# Altium PCB MCU(ZC-ST4X-A005A).PcbDoc (part 2 of 2)
Units mil, origin at the board's own origin, x right, y up, seen from the top; angles counter-clockwise.
Board outline 4255.94 x 3824.98 mil, 2 copper layers (Top Layer, Bottom Layer); 69 components, 79 nets, 331 pads, 521 vias.
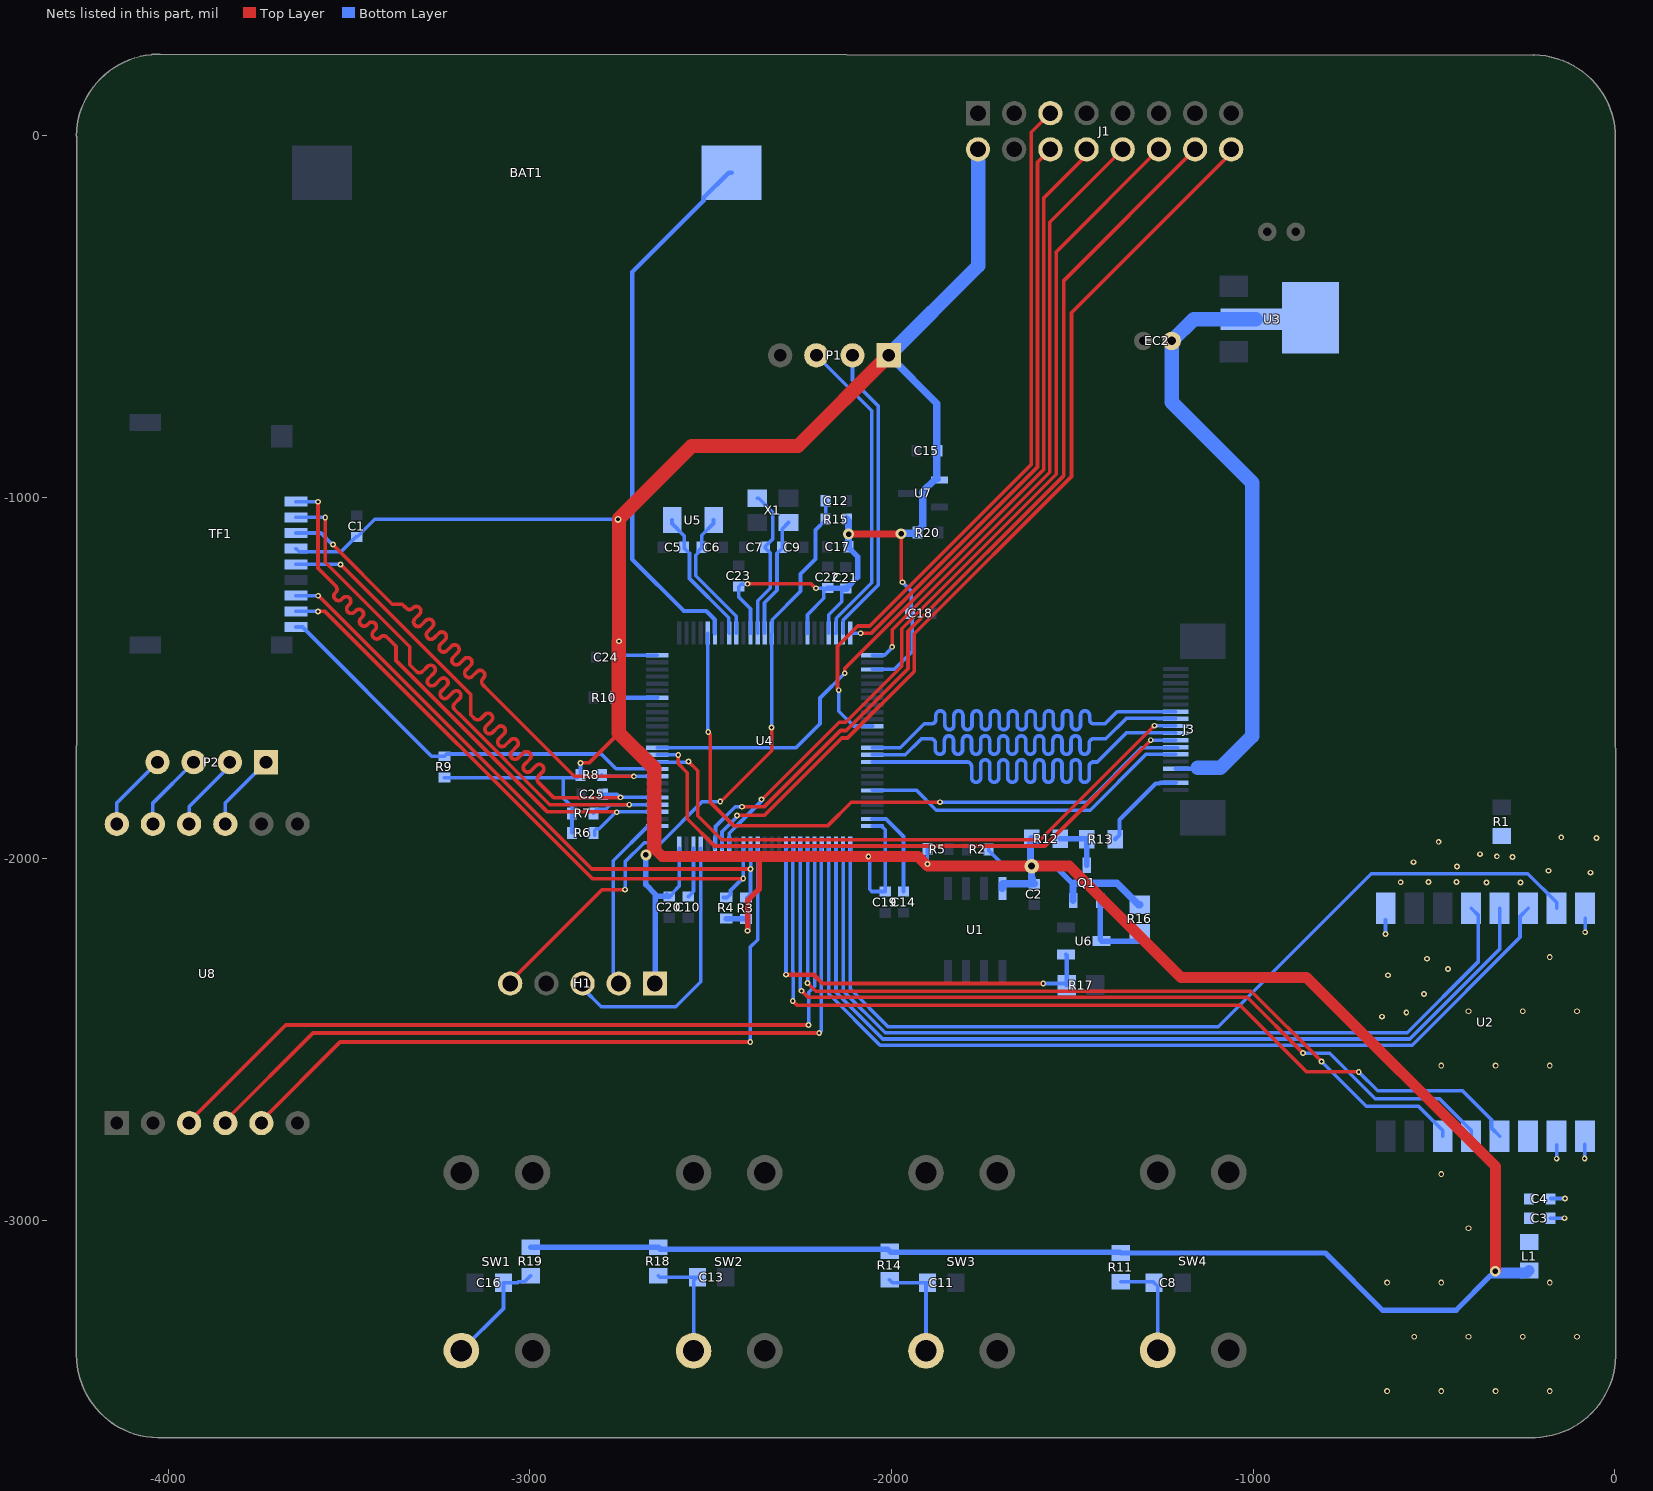
[diagram p2: the nets of this part, all layers, seen from the top]

## Via types
v1: diameter 16, hole 8, Top Layer to Bottom Layer, tented both sides, 270 vias
v2: diameter 16, hole 10, Top Layer to Bottom Layer, tented both sides, 245 vias
v3: diameter 30, hole 15, Top Layer to Bottom Layer, tented both sides, 4 vias
v4: diameter 40, hole 20, Top Layer to Bottom Layer, tented both sides, 1 vias
v5: diameter 20, hole 10, Top Layer to Bottom Layer, tented both sides, 1 vias

## Nets (pads, with @x,y where several pads share a name; then routed paths per layer and width w, separated by ;. In a path a pad name is that pad's centre, name@x,y a point inside that pad or via, vN(x,y) a via of type N, cw(c..) or ccw(c..) an arc to the next point about the centre after c; other vN are vias at no path point) (continued)
LCD_DB5: J3.7 U4.39 | length 1591.3
  Bottom Layer w10: U4.39@-2053.26,-1692.63 -1975.58,-1692.63 -1909.55,-1626.6 -1894.95,-1626.6 -1889.95,-1626.6 ccw(c-1889.95,-1614.1) -1877.45,-1614.1 -1877.45,-1603.18 cw(c-1864.95,-1603.18) -1852.45,-1603.18 -1852.45,-1630.2 ccw(c-1839.95,-1630.2) -1827.45,-1630.2 -1827.45,-1603.18 cw(c-1814.95,-1603.18) -1802.45,-1603.18 -1802.45,-1630.2 ccw(c-1789.95,-1630.2) -1777.45,-1630.2 -1777.45,-1603.18 cw(c-1764.95,-1603.18) -1752.45,-1603.18 -1752.45,-1630.2 ccw(c-1739.95,-1630.2) -1727.45,-1630.2 -1727.45,-1603.18 cw(c-1714.95,-1603.18) -1702.45,-1603.18 -1702.45,-1630.2 ccw(c-1689.95,-1630.2) -1677.45,-1630.2 -1677.45,-1603.18 cw(c-1664.95,-1603.18) -1652.45,-1603.18 -1652.45,-1630.2 ccw(c-1639.95,-1630.2) -1627.45,-1630.2 -1627.45,-1603.18 cw(c-1614.95,-1603.18) -1602.45,-1603.18 -1602.45,-1630.2 ccw(c-1589.95,-1630.2) -1577.45,-1630.2 -1577.45,-1603.18 cw(c-1564.95,-1603.18) -1552.45,-1603.18 -1552.45,-1630.2 ccw(c-1539.95,-1630.2) -1527.45,-1630.2 -1527.45,-1603.18 cw(c-1514.95,-1603.18) -1502.45,-1603.18 -1502.45,-1630.2 ccw(c-1489.95,-1630.2) -1477.45,-1630.2 -1477.45,-1603.18 cw(c-1464.95,-1603.18) -1452.45,-1603.18 -1452.45,-1614.1 ccw(c-1439.95,-1614.1) -1439.95,-1626.6 -1413.02,-1626.6 -1410,-1626.6 -1376.34,-1592.94 J3.7@-1214.35,-1592.94
LCD_DB6: J3.8 U4.40 | length 1587.7
  Bottom Layer w10: U4.40@-2053.26,-1712.31 -1961.65,-1712.31 -1921.27,-1671.93 -1917.36,-1668.02 -1891.26,-1668.02 cw(c-1891.26,-1680.52) -1878.76,-1680.52 -1878.76,-1698.12 ccw(c-1866.26,-1698.12) -1853.76,-1698.12 -1853.76,-1672.2 cw(c-1841.26,-1672.2) -1828.76,-1672.2 -1828.76,-1698.12 ccw(c-1816.26,-1698.12) -1803.76,-1698.12 -1803.76,-1672.2 cw(c-1791.26,-1672.2) -1778.76,-1672.2 -1778.76,-1698.12 ccw(c-1766.26,-1698.12) -1753.76,-1698.12 -1753.76,-1672.2 cw(c-1741.26,-1672.2) -1728.76,-1672.2 -1728.76,-1698.12 ccw(c-1716.26,-1698.12) -1703.76,-1698.12 -1703.76,-1672.2 cw(c-1691.26,-1672.2) -1678.76,-1672.2 -1678.76,-1698.12 ccw(c-1666.26,-1698.12) -1653.76,-1698.12 -1653.76,-1672.2 cw(c-1641.26,-1672.2) -1628.76,-1672.2 -1628.76,-1698.12 ccw(c-1616.26,-1698.12) -1603.76,-1698.12 -1603.76,-1672.2 cw(c-1591.26,-1672.2) -1578.76,-1672.2 -1578.76,-1698.12 ccw(c-1566.26,-1698.12) -1553.76,-1698.12 -1553.76,-1672.2 cw(c-1541.26,-1672.2) -1528.76,-1672.2 -1528.76,-1698.12 ccw(c-1516.26,-1698.12) -1503.76,-1698.12 -1503.76,-1672.2 cw(c-1491.26,-1672.2) -1478.76,-1672.2 -1478.76,-1698.12 ccw(c-1466.26,-1698.12) -1453.76,-1698.12 -1453.76,-1680.52 cw(c-1441.26,-1680.52) -1441.26,-1668.02 -1422.3,-1668.02 -1407.38,-1668.02 -1351,-1611.65 -1265,-1611.65 -1264.78,-1611.87 -1215.1,-1611.87 J3.8@-1214.35,-1612.62
LCD_DB7: J3.10 U4.41 | length 1581.5
  Bottom Layer w10: U4.41@-2053.26,-1732 -1821.1,-1732 -1791.1,-1732 cw(c-1791.1,-1744.5) -1778.6,-1744.5 -1778.6,-1775.64 ccw(c-1766.1,-1775.64) -1753.6,-1775.64 -1753.6,-1738.38 cw(c-1741.1,-1738.38) -1728.6,-1738.38 -1728.6,-1775.64 ccw(c-1716.1,-1775.64) -1703.6,-1775.64 -1703.6,-1738.38 cw(c-1691.1,-1738.38) -1678.6,-1738.38 -1678.6,-1775.64 ccw(c-1666.1,-1775.64) -1653.6,-1775.64 -1653.6,-1738.38 cw(c-1641.1,-1738.38) -1628.6,-1738.38 -1628.6,-1775.64 ccw(c-1616.1,-1775.64) -1603.6,-1775.64 -1603.6,-1738.38 cw(c-1591.1,-1738.38) -1578.6,-1738.38 -1578.6,-1775.64 ccw(c-1566.1,-1775.64) -1553.6,-1775.64 -1553.6,-1738.38 cw(c-1541.1,-1738.38) -1528.6,-1738.38 -1528.6,-1775.64 ccw(c-1516.1,-1775.64) -1503.6,-1775.64 -1503.6,-1738.38 cw(c-1491.1,-1738.38) -1478.6,-1738.38 -1478.6,-1775.64 ccw(c-1466.1,-1775.64) -1453.6,-1775.64 -1453.6,-1744.5 cw(c-1441.1,-1744.5) -1441.1,-1732 -1431,-1732 -1391.25,-1692.25 -1350.65,-1651.65 -1214.69,-1651.65 J3.10@-1214.35,-1651.99
LCD_RD: J3.9 U4.85 | length 1727.9
  Top Layer w10: v1(-2561.1,-1731.1) -2535.75,-1756.45 -2535.75,-1881 -2469.45,-1947.3 -1588.72,-1947.3 -1273.29,-1631.87 v1(-1273.29,-1631.65)
  Bottom Layer w10: U4.85@-2647.74,-1731.99 -2647.11,-1732.62 -2562.62,-1732.62 v1(-2561.1,-1731.1) ; v1(-1273.29,-1631.65) -1272.79,-1632.15 -1214.51,-1632.15 J3.9@-1214.35,-1632.31
LCD_RESET: J3.13 U4.45 | length 925.4
  Bottom Layer w10: U4.45@-2053.26,-1810.74 -1930.66,-1810.74 -1876.1,-1865.3 -1450.6,-1865.3 -1296.35,-1711.05 J3.13@-1214.35,-1711.05
LCD_RS: J3.12 U4.5 | length 1878.8
  Top Layer w10: v1(-2506.65,-1648.95) -2506.65,-1650.58 -2500.68,-1656.54 -2500.68,-1844.07 -2436.85,-1907.9 -2175.7,-1907.9 -2110.95,-1843.15 v1(-1865.8,-1843.15)
  Bottom Layer w10: U4.5@-2507.98,-1375.7 -2507.98,-1646 -2506.65,-1647.33 v1(-2506.65,-1648.95) ; v1(-1865.8,-1843.15) -1458.85,-1843.15 -1308.84,-1693.14 J3.12@-1208.7,-1693.14
LCD_WR: J3.11 U4.86 | length 1748.3
  Top Layer w10: v1@-2589.4,-1713.01 v1(-2589.79,-1712.62) -2589.79,-1736.31 -2564.6,-1761.5 -2564.6,-1889.15 -2489.45,-1964.3 -1575.94,-1964.3 v1(-1283.32,-1671.68)
  Bottom Layer w10: U4.86@-2647.74,-1712.31 -2647.64,-1712.21 -2591.07,-1712.21 -2590.65,-1712.62 v1(-2589.79,-1712.62) ; v1(-1283.32,-1671.68) J3.11@-1214.35,-1671.68
LED_A: J3.17 R13.1 | length 256.1
  Bottom Layer w12: R13.1@-1381.4,-1945.3 -1369.65,-1933.55 -1369.65,-1891.55 -1269.75,-1791.65 -1259.3,-1791.65 -1257.44,-1789.79 J3.17@-1214.35,-1789.79
LORA_DI00: U2.5 U4.58 | length 2423.4
  Top Layer w10: v1(-2248.75,-2364.75) -2230.65,-2382.85 -1016.5,-2382.85 v1(-862.5,-2536.85)
  Bottom Layer w10: U4.58@-2252.08,-1970.18 -2252.55,-1970.65 -2252.55,-2359.33 -2248.75,-2363.13 v1(-2248.75,-2364.75) ; v1(-862.5,-2536.85) -862.3,-2537.05 -788.58,-2537.05 -662.43,-2663.2 -484.78,-2663.2 -397.32,-2750.67 U2.5@-397.32,-2766.41
LORA_DI01: U2.6 U4.57 | length 2314.5
  Top Layer w10: v1(-2231.95,-2343.5) -2209.6,-2365.85 -1005.22,-2365.85 -810.85,-2560.21 v1(-810.85,-2560.45)
  Bottom Layer w10: U4.57@-2232.39,-1970.18 -2231.6,-1970.97 -2232.3,-1971.67 -2231.95,-1972.02 v1(-2231.95,-2343.5) ; v1(-810.85,-2560.45) -687.4,-2683.9 -542.82,-2683.9 -476.06,-2750.67 U2.6@-476.06,-2766.41
LORA_RESET: U2.4 U4.59 | length 2546.8
  Top Layer w10: v1(-2273.01,-2392.96) -2261.26,-2404.7 -1036.5,-2404.7 -852.2,-2589 v1(-708.35,-2589)
  Bottom Layer w10: v1(-2273.01,-2392.96) -2271.6,-2391.55 -2271.6,-2311.87 -2273.01,-2310.46 -2273.01,-1971.42 U4.59@-2271.76,-1970.18 ; v1(-708.35,-2589) -656.05,-2641.3 -421.15,-2641.3 -341.14,-2721.32 -341.14,-2743.85 U2.4@-318.58,-2766.41
ML307R-EN: U4.64 U8.5 | length 1992.8
  Top Layer w10: U8.5@-3742.05,-2730.35 -3742.05,-2723.8 -3524.6,-2506.35 v1(-2390.5,-2506.35)
  Bottom Layer w10: v1(-2390.5,-2506.35) -2390.5,-2243.45 -2370.19,-2223.14 U4.64@-2370.19,-1970.18
NetBAT1_1: BAT1.1 U4.6 | length 1521.9
  Bottom Layer w12: U4.6@-2488.3,-1375.7 -2488.39,-1375.61 -2488.39,-1338.86 -2512.45,-1314.8 -2574.05,-1314.8 -2716.85,-1172 -2716.85,-377.54 -2518.89,-179.58 -2518.89,-171.7 -2450.08,-102.9 BAT1.1@-2442.21,-102.9
NetC3_2: C3.2 C4.2 L1.2 U2.3
NetC5_2: C5.2 U4.8 U5.1 | length 378.2
  Bottom Layer w10: U5.1@-2606.9,-1063.11 -2606.9,-1072.96 -2573.5,-1106.36 -2573.5,-1140.72 -2564.72,-1149.5 -2564.46,-1149.5 -2558.6,-1155.36 -2558.6,-1224.85 -2449.83,-1333.62 -2449.83,-1374.79 U4.8@-2448.93,-1375.7
NetC6_2: C6.2 U4.9 U5.2 | length 379.9
  Bottom Layer w10: U5.2@-2492.1,-1063.11 -2492.1,-1072.96 -2524.48,-1105.34 -2524.48,-1139.92 -2525.38,-1139.92 -2534.21,-1148.75 -2534.21,-1153.08 -2541.25,-1160.13 -2541.25,-1217.4 -2429.24,-1329.41 U4.9@-2429.24,-1375.7
NetC7_2: C7.2 U4.12 X1.3 | length 421.6
  Bottom Layer w10: X1.3@-2371.31,-1002.93 -2367.37,-1002.93 -2328.5,-1041.81 -2328.5,-1115.73 -2349.2,-1136.43 C7.2@-2349.2,-1138.4 -2349.2,-1140.37 -2335.3,-1154.27 -2335.3,-1251.6 -2370.19,-1286.49 U4.12@-2370.19,-1375.7
NetC8_2: C8.2 R11.1 SW4.1 | length 284.4
  Bottom Layer w10: R11.1@-1366.25,-3168.65 -1277.41,-3168.65 C8.2@-1274.36,-3171.7 -1264.3,-3181.76 SW4.1@-1264.3,-3358.74
NetC9_1: C9.1 U4.13 X1.1 | length 333.7
  Bottom Layer w10: U4.13@-2350.5,-1375.7 -2351.25,-1374.95 -2351.25,-1291.59 -2316.55,-1256.89 -2316.55,-1154.79 -2302.53,-1140.77 -2302.53,-1087.7 X1.1@-2284.69,-1069.86
NetC10_2: C10.2 U4.73 | length 141.3
  Bottom Layer w10: C10.2@-2562.35,-2104.12 -2560.38,-2104.12 -2551.6,-2095.34 -2551.6,-2093.37 -2547.35,-2089.12 U4.73@-2547.35,-1970.18
NetC11_2: C11.2 R14.1 SW3.1 | length 297.7
  Bottom Layer w10: R14.1@-2005.5,-3163.3 -1997.1,-3171.7 C11.2@-1901.04,-3171.7 -1904.6,-3175.26 SW3.1@-1904.6,-3359.99
NetC13_2: C13.2 R18.1 SW2.1 | length 317.7
  Bottom Layer w10: R18.1@-2644.72,-3152.26 -2640.77,-3156.2 C13.2@-2536.96,-3156.2 -2547.3,-3166.55 SW2.1@-2547.3,-3360.19
NetC14_2: C14.2 U4.49 | length 258.3
  Bottom Layer w12: U4.49@-2053.26,-1889.48 -2015.47,-1889.48 -1966.8,-1938.15 C14.2@-1966.8,-2089.82
NetC16_2: C16.2 R19.1 SW1.1 | length 318.8
  Bottom Layer w10: SW1.1@-3189.25,-3359.39 -3072.84,-3242.99 C16.2@-3072.84,-3171.71 -3034.22,-3171.71 -3031.42,-3168.91 -3014.62,-3168.91 R19.1@-2997.97,-3152.26
NetP2_1: P2.1 U8.10 | length 219.1
  Top Layer w10: P2.1@-3729.5,-1732.7 P2.1@-3728.4,-1733.8
  Bottom Layer w10: U8.10@-3842.05,-1903.58 -3842.05,-1845.25 P2.1@-3729.5,-1732.7
NetP2_2: P2.2 U8.9 | length 218.3
  Top Layer w10: P2.2@-3829.5,-1732.7 P2.2@-3828.95,-1733.25
  Bottom Layer w10: U8.9@-3942.05,-1903.58 -3942.05,-1855.6 -3829.5,-1743.05 P2.2@-3829.5,-1732.7
NetP2_3: P2.3 U8.8 | length 218.3
  Top Layer w10: P2.3@-3929.5,-1732.7 P2.3@-3928.95,-1733.25
  Bottom Layer w10: U8.8@-4042.05,-1903.58 -4042.05,-1845.25 P2.3@-3929.5,-1732.7
NetP2_4: P2.4 U8.7 | length 218.3
  Top Layer w10: P2.4@-4029.5,-1732.7 P2.4@-4028.95,-1733.25
  Bottom Layer w10: U8.7@-4142.05,-1903.58 -4142.05,-1845.25 P2.4@-4029.5,-1732.7
NetQ1_1: Q1.1 R16.1 U6.3 | length 217.3
  Bottom Layer w15: U6.3@-1423.6,-2221.7 -1423.38,-2221.48 -1423.38,-2115.25 Q1.1@-1423.15,-2115.02 ; U6.3@-1419.2,-2227.1 -1310,-2227.1 R16.1@-1309.1,-2228
NetQ1_3: Q1.3 R12.2 R13.2 | length 145.8
  Bottom Layer w15: R12.2@-1533.35,-1944.45 -1461.25,-1944.45 R13.2@-1460.4,-1945.3 -1460.48,-1945.38 -1460.48,-2017.7 Q1.3@-1460.55,-2017.77
NetR10_2: R10.2 U4.94 | length 117.1
  Bottom Layer w12: R10.2@-2764.62,-1554.3 -2764.19,-1554.73 -2647.83,-1554.73 U4.94@-2647.74,-1554.83
NRST: C12.2 H1.5 R15.1 U4.14 | length 1788.6
  Top Layer w10: H1.5@-3057.29,-2341.74 -2800.65,-2085.1 v1(-2736.6,-2085.1) ; v1@-2472.3,-1841.95 -2331.55,-1701.2 v1(-2331.55,-1637.05)
  Bottom Layer w10: v1(-2736.6,-2085.1) -2736.6,-2008.12 -2683.92,-1955.43 -2636.78,-1955.43 -2522.9,-1841.55 v1(-2473.45,-1841.55) ; v1@-2330.82,-1637.05 U4.14@-2330.82,-1375.7 -2329.91,-1374.79 -2329.91,-1338.41 -2251.65,-1260.15 -2251.65,-1212.35 -2210.3,-1171 -2210.3,-1090.59 -2182.1,-1062.39 C12.2@-2182.1,-1009.4
PWM01: J1.5 U4.36 | length 2037.4
  Top Layer w10: v1(-2145.9,-1533.55) -2149.3,-1530.15 -2149.3,-1411.83 -2093.59,-1356.12 -2059.99,-1356.12 -1613.35,-909.48 -1613.35,9.2 J1.5@-1560.8,61.75
  Bottom Layer w10: v1(-2145.9,-1533.55) -2145.9,-1591.6 -2104.84,-1632.66 -2052.35,-1632.66 U4.36@-2053.26,-1633.57 ; J1.5@-1560.8,54.35 J1.5@-1560.8,61.75
RFGND: C3.1 C4.1 R1.2 U2.1 U2.2 U2.9 U2.16 | length 233.2
  Bottom Layer w10: v1(-634.2,-2207.55) U2.9@-634.2,-2168.68 ; C3.1@-178.37,-2993.3 v1(-139.5,-2993.3) ; C4.1@-176.92,-2938.8 v1(-138.05,-2938.8) ; v1(-161.1,-2828.85) U2.2@-161.1,-2789.98 ; v1(-83.55,-2828.35) U2.1@-83.55,-2789.48 ; v1(-82.2,-2202.7) U2.16@-82.2,-2163.83
  other v1: -644.2,-2436.15 -576.65,-2424.7 -527.8,-2373.8 -627.55,-2321.8 -461.25,-2304.15 -519.45,-2276.1 -354.85,-2065.55 -261.4,-2065.55 -592.35,-2064.6 -437.95,-2064.15 -515.4,-2063.65 -67.4,-2038.1 -183.8,-2032.9 -436.35,-2021 -556.9,-2009 -283.05,-1995.05 -326.45,-1992.85 -372.85,-1986.95 -487.25,-1952.85 -50.75,-1942.5 -148.45,-1940.4
  other v2: -629.9,-3471.44 -479.9,-3471.44 -329.9,-3471.44 -179.9,-3471.44 -554.9,-3321.44 -404.9,-3321.44 -254.9,-3321.44 -104.9,-3321.44 -629.9,-3171.44 -479.9,-3171.44 -179.9,-3171.44 -404.9,-3021.44 -479.9,-2871.44 -479.9,-2571.44 -329.9,-2571.44 -179.9,-2571.44 -404.9,-2421.44 -254.9,-2421.44 -104.9,-2421.44 -179.9,-2271.44
SBWTCK: H1.2 U4.76 | length 515.7
  Bottom Layer w10: H1.2@-2740.95,-2347.85 -2769.15,-2319.65 -2769.15,-2004.98 -2673.33,-1909.16 U4.76@-2647.74,-1909.16
SBWTDIO: H1.3 U4.72 | length 744.3
  Bottom Layer w10: H1.3@-2852.92,-2358.18 -2802.4,-2408.7 -2596.65,-2408.7 -2527.67,-2339.72 U4.72@-2527.67,-1970.18
SDIO_CK: C25.1 TF1.5 U4.80 | length 1684.3
  Top Layer w10: v1(-3523.5,-1185.7) -3163.65,-1545.55 -3163.65,-1601.15 -3156.4,-1608.4 -3152.86,-1611.94 ccw(c-3144.03,-1603.1) -3135.19,-1611.94 -3124.17,-1600.92 cw(c-3115.33,-1609.76) -3106.49,-1600.92 cw(c-3115.33,-1609.76) -3106.49,-1618.6 -3120.61,-1632.72 ccw(c-3111.77,-1641.56) -3120.61,-1650.4 ccw(c-3111.77,-1641.56) -3102.94,-1650.4 -3088.82,-1636.28 cw(c-3079.98,-1645.12) -3071.14,-1636.28 cw(c-3079.98,-1645.12) -3071.14,-1653.95 -3085.26,-1668.07 ccw(c-3076.42,-1676.91) -3085.26,-1685.75 ccw(c-3076.42,-1676.91) -3067.58,-1685.75 -3053.46,-1671.63 cw(c-3044.62,-1680.47) -3035.78,-1671.63 cw(c-3044.62,-1680.47) -3035.78,-1689.31 -3049.9,-1703.43 ccw(c-3041.06,-1712.27) -3049.9,-1721.11 ccw(c-3041.06,-1712.27) -3032.22,-1721.11 -3018.11,-1706.99 cw(c-3009.27,-1715.83) -3000.43,-1706.99 cw(c-3009.27,-1715.83) -3000.43,-1724.67 -3014.55,-1738.78 ccw(c-3005.71,-1747.62) -3014.55,-1756.46 ccw(c-3005.71,-1747.62) -2996.87,-1756.46 -2982.75,-1742.34 cw(c-2973.91,-1751.18) -2965.07,-1742.34 cw(c-2973.91,-1751.18) -2965.07,-1760.02 -2976.09,-1771.03 ccw(c-2967.25,-1779.87) -2976.09,-1788.71 -2934.38,-1830.42 -2925.26,-1830.42 -2749.97,-1830.42 v1(-2749.3,-1829.75)
  Bottom Layer w10: TF1.5@-3646.33,-1185.7 v1(-3523.5,-1185.7) ; C25.1@-2797.92,-1821.75 -2758.16,-1821.75 -2750.16,-1829.75 -2648.41,-1829.75 U4.80@-2647.74,-1830.42
SDIO_CMD: R8.1 TF1.3 U4.83 | length 1722.9
  Top Layer w10: v1(-3544.45,-1131.1) -3544.45,-1131.6 -3380.45,-1295.6 -3352.95,-1295.6 -3345.22,-1303.33 -3341.69,-1306.86 ccw(c-3332.85,-1298.02) -3324.01,-1306.86 -3322.8,-1305.65 cw(c-3313.97,-1314.49) -3305.13,-1305.65 cw(c-3313.97,-1314.49) -3305.13,-1323.33 -3317.91,-1336.11 ccw(c-3309.07,-1344.95) -3317.91,-1353.79 ccw(c-3309.07,-1344.95) -3300.23,-1353.79 -3287.45,-1341.01 cw(c-3278.61,-1349.85) -3269.77,-1341.01 cw(c-3278.61,-1349.85) -3269.77,-1358.69 -3282.55,-1371.47 ccw(c-3273.71,-1380.31) -3282.55,-1389.14 ccw(c-3273.71,-1380.31) -3264.87,-1389.14 ; -3264.87,-1389.14 -3252.09,-1376.36 cw(c-3243.25,-1385.2) -3234.42,-1376.36 cw(c-3243.25,-1385.2) -3234.42,-1394.04 -3247.2,-1406.82 ccw(c-3238.36,-1415.66) -3247.2,-1424.5 ccw(c-3238.36,-1415.66) -3229.52,-1424.5 -3216.74,-1411.72 cw(c-3207.9,-1420.56) -3199.06,-1411.72 cw(c-3207.9,-1420.56) -3199.06,-1429.4 -3211.84,-1442.18 ccw(c-3203,-1451.02) -3211.84,-1459.86 ccw(c-3203,-1451.02) -3194.16,-1459.86 -3181.38,-1447.08 cw(c-3172.54,-1455.91) -3163.71,-1447.08 cw(c-3172.54,-1455.91) -3163.71,-1464.75 -3176.49,-1477.53 ccw(c-3167.65,-1486.37) -3176.49,-1495.21 ccw(c-3167.65,-1486.37) -3158.81,-1495.21 -3146.03,-1482.43 cw(c-3137.19,-1491.27) -3128.35,-1482.43 cw(c-3137.19,-1491.27) -3128.35,-1500.11 -3129.56,-1501.32 ccw(c-3120.72,-1510.15) -3129.56,-1518.99 -3116.58,-1531.97 -2877.19,-1771.36 -2712.83,-1771.36 v1(-2712.51,-1771.68)
  Bottom Layer w10: TF1.3@-3646.33,-1099.09 -3577.61,-1099.09 -3545.6,-1131.1 v1(-3544.45,-1131.1) ; R8.1@-2800.87,-1768 -2797.19,-1771.68 v1(-2712.51,-1771.68) -2712.2,-1771.36 U4.83@-2647.74,-1771.36
SDIO_D0: R3.1 TF1.7 U4.65 | length 1716.4
  Top Layer w10: v1(-3585.2,-1272.35) -3584.21,-1272.35 -2828.73,-2027.83 v1(-2390.19,-2027.85)
  Bottom Layer w10: TF1.7@-3646.33,-1272.32 v1(-3585.2,-1272.35) ; R3.1@-2400.1,-2107.77 -2390.92,-2098.59 -2390.92,-2093 -2389.85,-2091.93 -2389.85,-2028.19 v1(-2390.19,-2027.85) -2389.15,-2026.79 U4.65@-2389.15,-1965.26
SDIO_D1: R4.1 TF1.8 U4.66 | length 1709.4
  Top Layer w10: v1(-3585.55,-1315.8) -3566.35,-1315.8 -2827.75,-2054.4 v1(-2409.9,-2054.4)
  Bottom Layer w10: TF1.8@-3646.33,-1315.62 -3585.73,-1315.62 v1(-3585.55,-1315.8) ; R4.1@-2464.94,-2106.87 -2454.79,-2106.87 -2445.32,-2097.39 -2445.32,-2087.24 -2413.62,-2055.55 -2411.05,-2055.55 v1(-2409.9,-2054.4) ; v1@-2410.19,-2054.11 -2410.19,-1970.81 U4.66@-2409.56,-1970.18
SDIO_D2: R6.1 TF1.1 U4.78 | length 1733.3
  Top Layer w10: v1(-3585.6,-1012.55) -3585.6,-1196.5 -3553.19,-1228.91 -3536.62,-1245.48 cw(c-3545.46,-1254.32) -3536.62,-1263.15 -3538.04,-1264.57 ccw(c-3529.2,-1273.41) -3538.04,-1282.25 ccw(c-3529.2,-1273.41) -3520.36,-1282.25 -3516.44,-1278.32 cw(c-3507.6,-1287.16) -3498.76,-1278.32 cw(c-3507.6,-1287.16) -3498.76,-1296 -3502.69,-1299.93 ccw(c-3493.85,-1308.77) -3502.69,-1317.61 ccw(c-3493.85,-1308.77) -3485.01,-1317.61 -3481.08,-1313.68 cw(c-3472.24,-1322.52) -3463.4,-1313.68 cw(c-3472.24,-1322.52) -3463.4,-1331.36 -3467.33,-1335.28 ccw(c-3458.49,-1344.12) -3467.33,-1352.96 ccw(c-3458.49,-1344.12) -3449.65,-1352.96 -3445.72,-1349.03 cw(c-3436.89,-1357.87) -3428.05,-1349.03 cw(c-3436.89,-1357.87) -3428.05,-1366.71 -3431.98,-1370.64 ccw(c-3423.14,-1379.48) -3431.98,-1388.32 ccw(c-3423.14,-1379.48) -3414.3,-1388.32 -3412.88,-1386.9 cw(c-3404.04,-1395.74) -3395.2,-1386.9 -3391.67,-1390.43 -3369.93,-1412.18 -3369.93,-1451.52 -2951.35,-1870.1 -2759.8,-1870.1 v1@-2758.8,-1871.1
  Bottom Layer w10: TF1.1@-3646.33,-1012.47 -3585.68,-1012.47 v1(-3585.6,-1012.55) ; R6.1@-2820.62,-1935.15 -2820.62,-1921.17 -2815.77,-1916.32 -2808.17,-1916.32 -2763.91,-1872.06 -2760.94,-1872.06 v1(-2759.8,-1870.92) ; v1@-2759.8,-1870.1 -2703.95,-1870.1 -2703.63,-1869.79 U4.78@-2647.74,-1869.79
SDIO_D3: R7.1 TF1.2 U4.79 | length 1744
  Top Layer w10: v1(-3565.6,-1056.5) -3565.6,-1179.75 -3331.7,-1413.65 -3331.7,-1463.35 -3326.32,-1468.73 -3313.71,-1481.34 ccw(c-3304.87,-1472.5) -3296.03,-1481.34 -3282.81,-1468.11 cw(c-3273.97,-1476.95) -3265.13,-1468.11 cw(c-3273.97,-1476.95) -3265.13,-1485.79 -3279.53,-1500.2 ccw(c-3270.69,-1509.04) -3279.53,-1517.88 ccw(c-3270.69,-1509.04) -3261.86,-1517.88 -3247.45,-1503.47 cw(c-3238.61,-1512.31) -3229.77,-1503.47 cw(c-3238.61,-1512.31) -3229.77,-1521.15 -3244.18,-1535.55 ccw(c-3235.34,-1544.39) -3244.18,-1553.23 ccw(c-3235.34,-1544.39) -3226.5,-1553.23 -3212.09,-1538.82 cw(c-3203.26,-1547.66) -3194.42,-1538.82 cw(c-3203.26,-1547.66) -3194.42,-1556.5 -3207.64,-1569.73 ccw(c-3198.8,-1578.57) -3207.64,-1587.41 -3186.43,-1608.62 -2944.95,-1850.1 v1(-2725.05,-1850.1)
  Bottom Layer w10: TF1.2@-3646.33,-1055.78 -3568.37,-1055.78 -3567.65,-1056.5 v1(-3565.6,-1056.5) ; R7.1@-2823.95,-1874.1 -2823.95,-1871.15 -2815.17,-1862.37 -2789.82,-1862.37 -2777.55,-1850.1 v1(-2725.05,-1850.1) U4.79@-2647.74,-1850.1
SDIO_WP: R9.1 TF1.CD U4.84 | length 1166.2
  Bottom Layer w10: TF1.CD@-3646.33,-1358.93 -3628.61,-1358.93 -3271.64,-1715.9 R9.1@-3236,-1715.9 ; R9.1@-3236,-1716.22 -3229.88,-1710.1 -2802.2,-1710.1 -2761.53,-1750.77 -2648.65,-1750.77 U4.84@-2647.74,-1751.68
SPI2_LORA_MISO: U2.13 U4.53 | length 2502.7
  Bottom Layer w10: U4.53@-2153.65,-1970.18 -2153.65,-2368.79 -2024.59,-2497.85 -567.46,-2497.85 -318.58,-2248.97 U2.13@-318.58,-2136.49
SPI2_LORA_MOSI: U2.14 U4.54 | length 2585.7
  Bottom Layer w10: U4.54@-2173.34,-1970.18 -2173.34,-2373.15 -2031.63,-2514.85 -560.42,-2514.85 -262.4,-2216.83 -262.4,-2159.05 U2.14@-239.84,-2136.49
SPI2_LORA_NSS: U2.15 U4.51 | length 2609.5
  Bottom Layer w10: U4.51@-2114.28,-1970.18 -2114.28,-2359.27 -2009.7,-2463.85 -1096.35,-2463.85 -673.5,-2041 -240.9,-2041 -161.16,-2120.75 U2.15@-161.16,-2136.49
SPI2_LORA_SCK: U2.12 U4.52 | length 2436.2
  Bottom Layer w10: U4.52@-2133.97,-1970.18 -2133.97,-2364.43 -2017.55,-2480.85 -574.5,-2480.85 -377.35,-2283.7 -377.35,-2156.46 U2.12@-397.32,-2136.49
TF28QS044-POWER: R17.2 U4.60 U6.1 | length 1224.2
  Top Layer w12: v1(-2291.6,-2320.15) -2215.2,-2320.15 -2190.7,-2344.65 v1(-1580.6,-2344.65)
  Bottom Layer w12: v1(-2291.6,-2320.15) -2291.6,-1970.33 U4.60@-2291.45,-1970.18 ; v1(-1580.6,-2344.65) -1520.1,-2344.65 R17.2@-1515.35,-2349.4 -1515.35,-2266.75 U6.1@-1517.6,-2264.5
UART4_RX: P1.2 U4.24 | length 838.2
  Bottom Layer w10: U4.24@-2133.96,-1375.7 -2133.06,-1374.79 -2133.06,-1338.65 -2036.2,-1241.79 -2036.2,-748.55 -2107.85,-676.9 P1.2@-2107.85,-607.7
UART4_TX: P1.3 U4.23 | length 872.4
  Bottom Layer w10: P1.3@-2207.85,-607.7 -2054.7,-760.85 -2054.7,-1236.25 -2152.74,-1334.29 -2152.74,-1374.79 U4.23@-2153.65,-1375.7
USART1_SENSOR_CTRL: J1.14 U4.70 | length 2539.3
  Top Layer w10: v1(-2413.6,-1855.7) -2413.25,-1855.35 -2351.22,-1855.35 -2140.87,-1645 -2124.85,-1645 -1954.45,-1474.6 -1954.45,-1370.82 -1523.35,-939.72 -1523.35,-400.8 J1.14@-1160.8,-38.25
  Bottom Layer w10: U4.70@-2488.3,-1970.18 -2489.65,-1968.83 -2486.52,-1965.69 -2486.52,-1910.48 -2431.73,-1855.7 v1(-2413.6,-1855.7)
USART1_SENSOR_RX: J1.16 U4.69 | length 2569.1
  Top Layer w10: v1(-2427.5,-1879.75) -2351.57,-1879.75 -2137.52,-1665.7 -2121.5,-1665.7 -1937.45,-1481.65 -1937.45,-1377.86 -1502.35,-942.77 -1502.35,-490.04 -1060.8,-48.49 J1.16@-1060.8,-38.25
  Bottom Layer w10: U4.69@-2468.61,-1970.18 -2468.83,-1969.96 -2468.83,-1924.54 -2427.5,-1883.21 v1(-2427.5,-1879.75)
USART1_SENSOR_TX: J1.12 U4.68 | length 2435.9
  Top Layer w10: v1(-2359.5,-1835.35) -2357.35,-1835.35 -2144.4,-1622.4 -2126.28,-1622.4 -1971.45,-1467.56 -1971.45,-1363.78 -1544.4,-936.73 -1544.4,-321.85 J1.12@-1260.8,-38.25
  Bottom Layer w10: U4.68@-2448.93,-1970.18 -2448.93,-1929.46 -2413.22,-1893.75 -2360.65,-1841.18 -2360.65,-1836.5 v1(-2359.5,-1835.35)
USART2_RS485_CTRL: J1.8 U4.87 | length 2370.7
  Top Layer w10: v1(-2129.3,-1486.63) -2129.3,-1473.55 -1579.35,-923.6 -1579.35,-172.75 -1477.09,-70.49 -1477.09,-69.95 -1460.8,-53.65 J1.8@-1460.8,-38.25
  Bottom Layer w10: U4.87@-2647.74,-1692.62 -2264.14,-1692.62 -2197.75,-1626.23 -2197.75,-1555.08 v1(-2129.3,-1486.63)
USART2_RS485_RX: J1.10 U4.26 | length 1705.2
  Top Layer w10: v1(-1998.15,-1413.73) -1998.15,-1366.44 -1562.35,-930.64 -1562.35,-239.8 J1.10@-1360.8,-38.25
  Bottom Layer w10: U4.26@-2053.26,-1436.72 -2019.22,-1436.72 -1998.15,-1415.65 v1(-1998.15,-1413.73)
USART2_RS485_TX: J1.6 U4.25 | length 1601.5
  Top Layer w10: v1(-2085.31,-1376.12) -2084.88,-1375.7 -2055.52,-1375.7 -1596.35,-916.53 -1596.35,-73.8 J1.6@-1560.8,-38.25
  Bottom Layer w10: U4.25@-2114.28,-1375.7 -2113.85,-1376.12 v1(-2085.31,-1376.12)
USART3_ML307_MCU_RXD: U4.56 U8.3 | length 2324.8
  Top Layer w10: U8.3@-3942.05,-2730.35 -3942.05,-2726.7 -3674.6,-2459.25 v1(-2229.55,-2459.25)
  Bottom Layer w10: v1(-2229.55,-2459.25) -2228.75,-2458.45 -2228.75,-2368.58 -2211.95,-2351.78 -2211.95,-1970.62 U4.56@-2212.39,-1970.18 ; U4.56@-2213.61,-1971.09 U4.56@-2212.71,-1970.18
USART3_ML307_MCU_TXD: U4.55 U8.4 | length 2263.3
  Top Layer w10: U8.4@-3842.05,-2730.35 -3842.05,-2723.7 -3599.75,-2481.4 v1(-2200,-2481.4)
  Bottom Layer w10: v1(-2200,-2481.4) -2194.8,-2476.2 -2194.8,-1972.2 -2192.9,-1970.3 U4.55@-2193.02,-1970.18
VCC_2V8: EC2.1 J3.15 U3.2 | length 1691.1
  Bottom Layer w12: J3.15@-1214.35,-1750.42 -1155.97,-1750.42 -1153.55,-1748
  Bottom Layer w40: -1153.55,-1748 -1090.55,-1748 -1002.9,-1660.35 -1002.9,-960.05 -1225.38,-737.57 EC2.1@-1225.38,-568.05 -1225.14,-568.05 -1164.74,-507.65 U3.2@-992.48,-507.65
VCC_3V3: C1.2 C2.2 C15.2 C17.2 C18.2 C19.2 C20.2 C21.2 C22.2 C23.2 C24.2 H1.1 J1.2 L1.1 P1.1 Q1.2 R2.2 R3.2 R4.2 R5.1 R6.2 R7.2 R8.2 R9.2 R11.2 R12.1 R14.2 R15.2 R16.2 R18.2 R19.2 R20.1 TF1.4 U1.8 U4.11 U4.19 U4.22 U4.28 U4.50 U4.75 U4.100 U7.1 | length 14612.4
  Top Layer w10: v1(-2859.93,-1734.62) -2836.22,-1734.62 -2753.65,-1652.05 ; v3(-2679.05,-1988.75) v3@-2679.05,-1988 ; v1(-2397.81,-1239.44) -2222.48,-1239.44 -2210.32,-1251.6 v1(-2208.7,-1251.6) ; v3@-1985.5,-1101.49 v3@-1981,-1105.99 ; v3(-1973.55,-1101.05) -1973.55,-1231.15 v1(-1969.64,-1235.06)
  Top Layer w15: v1(-2398,-2198.65) -2398,-2115.55 -2366.25,-2083.8 -2366.25,-1993.5
  Top Layer w20: v3@-2679.05,-1988 -2656.4,-1965.35 ; -2656.4,-1962.25 -2651.51,-1957.36 ; v3(-2118.72,-1101.93) -2118.28,-1101.49 v3@-1985.5,-1101.49
  Top Layer w30: -2651.51,-1957.36 -2651.51,-1975.93 -2633.94,-1993.5 -2366.25,-1993.5 v1(-2064.2,-1993.5) -1926.95,-1993.5 -1900.75,-2019.7 v4(-1612.95,-2019.7) -1508.45,-2019.7 -1200.05,-2328.1 -852.4,-2328.1 -330.5,-2850 v3@-330.5,-3138.1
  Top Layer w40: v1(-2753.65,-1398.3) -2753.65,-1652.05 -2656.4,-1749.3 -2656.4,-1965.35 ; v1@-2753.5,-1393.35 -2753.5,-1059.5 -2552.45,-858.45 -2258.6,-858.45 P1.1@-2007.85,-607.7
  Bottom Layer w10: TF1.4@-3646.33,-1142.4 -3637.82,-1150.9 -3608.34,-1150.9 -3608.15,-1151.1 -3522.27,-1151.1 -3480.82,-1109.65 C1.2@-3478.85,-1109.65 -3476.88,-1109.65 -3428.53,-1061.3 v5(-2756.3,-1061.3) ; R9.2@-3236,-1775.28 -2907.65,-1775.28 ; R6.2@-2883.61,-1928.05 -2883.31,-1927.75 -2883.31,-1874.4 R7.2@-2883.01,-1874.1 -2883.01,-1856.21 -2907.65,-1831.57 -2907.65,-1775.28 ; v1(-2859.93,-1734.62) R8.2@-2859.93,-1768 -2867.21,-1775.28 -2907.65,-1775.28 ; C24.2@-2758.65,-1441.85 -2753.65,-1436.85 v1(-2753.65,-1398.3) ; C24.2@-2753.52,-1436.72 U4.100@-2647.74,-1436.72 ; C20.2@-2621.87,-2096.45 -2614.87,-2103.45 C20.2@-2614.6,-2103.72 ; C20.2@-2612.63,-2103.72 -2603.85,-2094.94 -2603.85,-2092.3 -2586.72,-2075.17 U4.75@-2586.72,-1970.18 ; R4.2@-2457.05,-2165.23 R4.2@-2456.85,-2165.43 ; R3.2@-2402.85,-2165.43 R3.2@-2402.65,-2165.63 ; v1(-2397.81,-1239.44) -2398.96,-1240.59 -2415.61,-1240.59 C23.2@-2422.4,-1247.38 -2422.4,-1276.16 -2390,-1308.56 -2390,-1375.57 U4.11@-2389.87,-1375.7 ; U4.19@-2232.39,-1375.7 -2232.39,-1324.89 -2187.2,-1279.7 -2187.2,-1259.61 C22.2@-2179.19,-1251.6 ; v1(-2208.7,-1251.6) C22.2@-2179.19,-1251.6 ; C22.2@-2175.95,-1251.33 C22.2@-2176.45,-1250.83 -2177.22,-1251.6 C22.2@-2179.19,-1251.6 ; U4.22@-2173.33,-1375.7 -2173.33,-1325.23 -2137.4,-1289.3 -2137.4,-1260.61 -2128.62,-1251.83 C21.2@-2126.65,-1251.83 C21.2@-2127.15,-1251.33 ; v1(-2064.2,-1993.5) -2060.1,-1997.6 -2060.1,-2084.26 -2054.24,-2090.12 C19.2@-2017.7,-2090.12 -2017.7,-1919.13 -2027.67,-1909.16 U4.50@-2053.26,-1909.16 ; U4.28@-2053.26,-1476.09 -2052.35,-1475.18 -1990.78,-1475.18 -1942.45,-1426.85 -1942.45,-1326.48 C18.2@-1948.53,-1320.4 -1945.95,-1317.82 -1945.95,-1258.75 v1(-1969.64,-1235.06) ; R5.1@-1901.18,-1973.15 -1900.75,-1973.58 v1(-1900.75,-2014.45) ; C15.2@-1872.57,-871.2 -1872.57,-947.38 U7.1@-1867.85,-952.1 ; R2.2@-1731.69,-1973.5 -1731.69,-1976.45 -1688.45,-2019.7 v4(-1612.95,-2019.7)
  Bottom Layer w15: R19.2@-2997.97,-3073.26 R18.2@-2644.72,-3073.26 -2639.19,-3078.78 -2011.02,-3078.78 R14.2@-2005.5,-3084.3 -2002.82,-3086.98 -1368.92,-3086.98 R11.2@-1366.25,-3089.65 -800.6,-3089.65 -642.35,-3247.9 -438.95,-3247.9 -343.35,-3152.3 -255.19,-3152.3 -248.99,-3146.1 L1.1@-248.99,-3142.89 ; v3(-2679.05,-1988.75) -2679.05,-2071.4 -2653.5,-2096.95 ; H1.1@-2652.26,-2323.69 -2652.26,-2314.71 -2653.5,-2313.47 -2653.5,-2103.45 -2653.5,-2096.95 ; C20.2@-2614.87,-2103.45 -2621.87,-2103.45 -2647,-2103.45 -2653.5,-2096.95 ; R4.2@-2456.85,-2165.43 R3.2@-2402.85,-2165.43 ; R3.2@-2402.65,-2165.63 -2398,-2170.28 v1(-2398,-2198.65) ; C22.2@-2175.95,-1251.33 C21.2@-2127.15,-1251.33 ; C21.2@-2124.68,-1251.83 -2093.9,-1221.05 -2093.9,-1164.09 C17.2@-2118.72,-1139.27 ; v4(-1612.95,-2019.7) -1548.02,-2019.7 -1497.95,-2069.77
  Bottom Layer w20: C21.2@-2126.65,-1251.83 C21.2@-2124.68,-1251.83 ; R15.2@-2122.97,-1060.35 -2122.97,-1062.32 -2118.72,-1066.57 v3(-2118.72,-1101.93) C17.2@-2118.72,-1137.3 C17.2@-2118.72,-1139.27 ; P1.1@-2007.85,-607.7 -1874.75,-740.8 U7.1@-1874.75,-949.74 ; v3(-1973.55,-1101.05) -1971.98,-1099.48 -1930.4,-1099.48 R20.1@-1928.83,-1097.9 -1928.83,-1094.95 -1913.4,-1079.52 -1913.4,-984.19 U7.1@-1881.47,-952.26 ; U1.8@-1693.7,-2081.55 -1693.7,-2069.85 -1692.68,-2068.82 C2.2@-1607.47,-2068.82 ; C2.2@-1605.5,-2068.82 C2.2@-1607.47,-2068.82 ; R12.1@-1600.7,-1956.1 R12.1@-1612.35,-1944.45 -1615.84,-1947.94 -1615.84,-2016.81 v4(-1612.95,-2019.7) -1612.95,-2053.33 -1611.25,-2055.03 -1611.25,-2065.04 C2.2@-1607.47,-2068.82 ; Q1.2@-1497.95,-2115.02 -1497.95,-2069.77 -1495.43,-2067.25 -1376.3,-2067.25 -1317.1,-2126.45 R16.2@-1313.75,-2126.45
  Bottom Layer w30: v3(-331.05,-3140) -327.05,-3144 -242.95,-3144 L1.1@-237.1,-3138.15
  Bottom Layer w40: P1.1@-2007.85,-607.7 -1760.8,-360.65 J1.2@-1760.8,-38.25
pads on no net: J1.15 J3.5 SW1.3 SW2.3 SW3.3 SW4.3 U2.7 U2.8 U2.10 U2.11 U4.1 U4.2 U4.3 U4.4 U4.7 U4.15 U4.16 U4.17 U4.18 U4.21 U4.33 U4.34 U4.37 U4.42 U4.43 U4.44 U4.46 U4.89 U4.90 U4.91 U4.92 U4.93 U4.95 U4.96 U4.97 U4.98 U8.6 U8.11 U8.12

## Polygon pours and split planes (outlines as drawn)
RFGND on Top Layer "NONET_L-01_P-001" (solid, remove dead copper, pour order 8): 4.95,-1916.4 -1.95,-1909.5 -527.2,-1909.5 -687.25,-2069.55 -687.25,-3520.75 -690.7,-3524.2 -622.7,-3592.2 -159,-3592.2 -150.9,-3584.1 -69.95,-3584.1 -69.95,-3576.1 5.2,-3500.95 5.2,-3400.86
GND on Top Layer "NONET_L-01_P-001" (solid, remove dead copper, pour order 6): -4274.75,323.37 -4352.95,245.17 -4352.95,-3764.98 -913.9,-3764.98 -709.5,-3560.58 -709.5,-2063.53 -538.15,-1892.18 9,-1892.18 9,272.27
no net on Top Layer "NONET_L-01_P-001" (solid, pour order 4): -969.53,-809.5
RFGND on Bottom Layer "NONET_L-01_P-001" (solid, remove dead copper, pour order 9): 2.41,-1918.41 -4.49,-1911.51 -529.74,-1911.51 -689.79,-2071.56 -689.79,-3522.76 -693.24,-3526.21 -625.24,-3594.21 -161.54,-3594.21 -153.44,-3586.11 -72.49,-3586.11 -72.49,-3578.11 2.66,-3502.96 2.66,-3402.88
GND on Bottom Layer "NONET_L-01_P-001" (solid, remove dead copper, pour order 7): -4280,339.2 -4358.2,261 -4358.2,-3726.15 -896.15,-3726.15 -714.75,-3544.75 -714.75,-2047.7 -543.4,-1876.35 3.75,-1876.35 3.75,288.1

## Keep-outs
Keep-Out Layer:
  lines w2.95: -4252.35,-0.78 cw(c-4024.8,-4.62) -4020.96,222.93 ; -4251.88,-3371.43 -4251.38,12.46 ; -4251.85,-3367.62 ccw(c-4024.3,-3371.46) -4028.14,-3599.01 ; -4043.88,222.96 -203.38,219.96 ; -4028.14,-3599.04 -221.88,-3599.04 ; -946.5,-1304.7 cw(c-876.27,-1373.93) -807.05,-1303.7 ; -946.5,-1304.45 -946.5,-1991.65 ccw(c-877.27,-1921.43) -807.05,-1990.65 -807.05,-1303.45 ; -230.8,-3598.5 ccw(c-226.96,-3370.96) 0.59,-3374.8 ; -223.62,221.43 cw(c-227.46,-6.12) 0.08,-9.95
  lines w3: 0.08,-9.95 0.59,-3374.8

## Other copper
Bottom Layer:
  pour cut-out: -3095.94,-697.95 -3095.94,-831.73 ccw(c-3090.48,-831.73) -3094.34,-835.6 ccw(c-3090.36,-831.61) -3090.36,-837.25 -3050.54,-837.24 ccw(c-3050.54,-694.84) -2908.14,-694.84
  pour cut-out: -941.49,-2675.69 -941.49,-2541.9 ccw(c-946.96,-2541.9) -943.09,-2538.04 ccw(c-947.08,-2542.02) -947.08,-2536.39 -986.89,-2536.39 ccw(c-986.9,-2678.79) -1129.3,-2678.79
  pour cut-out: -943.39,-703.14 -943.39,-836.93 cw(c-948.86,-836.93) -944.99,-840.79 cw(c-948.98,-836.8) -948.98,-842.44 -988.79,-842.44 cw(c-988.8,-700.04) -1131.2,-700.03
  pour cut-out: -3094.24,-2676.24 -3094.24,-2542.45 cw(c-3088.78,-2542.45) -3092.64,-2538.59 cw(c-3088.66,-2542.57) -3088.66,-2536.94 -3048.84,-2536.94 cw(c-3048.84,-2679.34) -2906.44,-2679.34
  region net GND: -1015.05,-569.05 -1150.75,-569.05 -1176.4,-594.7 -1176.4,-630 -1159.9,-646.5 -1017.2,-646.5 -1014.1,-643.4 -1014.1,-629.4
  region net NetC3_2: -267.85,-2724 -270.3,-2726.45 -270.3,-3076.6 -262.95,-3083.95 -210.9,-3083.95 -210.9,-3019.1 -220.1,-3009.9 -219.45,-3009.25 -219.45,-2824.35 -210.3,-2815.2 -212.15,-2813.35 -212.15,-2724.6
Multi-Layer:
  pour cut-out: -3658.14,-507.33 cw(c-3658.14,-369.54) -3795.93,-369.54 cw(c-3658.14,-369.54) -3658.14,-231.74 cw(c-3658.14,-369.54) -3520.34,-369.54 cw(c-3658.14,-369.54)
  pour cut-out: -590.3,-508.18 cw(c-590.3,-370.39) -728.1,-370.39 cw(c-590.3,-370.39) -590.3,-232.59 cw(c-590.3,-370.39) -452.51,-370.39 cw(c-590.3,-370.39)
  pour cut-out: -727.06,-3007.52 ccw(c-589.26,-3007.52) -589.26,-3145.32 ccw(c-589.26,-3007.52) -451.47,-3007.52 ccw(c-589.26,-3007.52) -589.26,-2869.73 ccw(c-589.26,-3007.52)
  pour cut-out: -3660.28,-3146 cw(c-3660.28,-3008.2) -3798.07,-3008.2 cw(c-3660.28,-3008.2) -3660.28,-2870.41 cw(c-3660.28,-3008.2) -3522.48,-3008.2 cw(c-3660.28,-3008.2)

## Silkscreen, mask and mechanical layers (free items; w line width, h text height)
Top Overlay:
  circle w10: c-3658.08,-369.5 r137.8
  circle w10: c-589.67,-3006.95 r137.8
  circle w10: c-3660.67,-3007.45 r137.8
  circle w10: c-590.17,-370 r137.8
  text "20260305" at -4225.35,-3298.99 h120
  text "ZC-ST4X-A005A" at -4222.15,-3403.49 h120
Bottom Overlay:
  lines w9.84: -3093.61,-835.57 -3093.61,-707.89 -3093.61,-699.89 -2908.64,-699.89 ; -3093.19,-707.89 -2982.84,-814.84 ; -3092.89,-777.87 -3036.85,-835.44 ; -3090.36,-2542.66 -3090.36,-2670.34 -3090.36,-2678.34 -2905.39,-2678.34 ; -3089.94,-2670.34 -2979.59,-2563.39 ; -3089.64,-2600.36 -3033.6,-2542.78 ; -3031.49,-700.04 -2947.94,-784.84 ; -3028.24,-2678.19 -2944.69,-2593.39 ; -2969.45,-701.73 -2923.34,-749.04 ; -2966.2,-2676.49 -2920.09,-2629.19 ; -1132.24,-701.04 -947.27,-701.04 -947.27,-709.04 -947.27,-836.72 ; -1130.34,-2677.79 -945.37,-2677.79 ; -1117.54,-750.19 -1071.44,-702.88 ; -1115.64,-2628.64 -1069.54,-2675.94 ; -1092.94,-785.99 -1009.39,-701.19 ; -1091.04,-2592.84 -1007.49,-2677.64 ; -1058.04,-815.99 -947.69,-709.04 ; -1056.14,-2562.84 -945.37,-2673.61 -945.37,-2614.19 ; -1004.04,-836.59 -948,-779.02
  lines w10: -3093.61,-835.66 ccw(c-3066.49,-678.09) -2908.16,-700.31 ; -3090.36,-2542.57 cw(c-3063.24,-2700.14) -2904.91,-2677.91 ; -1132.73,-701.46 ccw(c-974.4,-679.24) -947.27,-836.81 ; -1130.83,-2677.36 cw(c-972.5,-2699.59) -986.71,-2540.34
Mechanical 1:
  circle w10: c-3658.08,-369.5 r66.93
  circle w10: c-3661.03,-3007.8 r66.93
  circle w10: c-590.17,-3007.8 r66.93
  circle w10: c-590.17,-370 r66.93
  lines w0.98: -3427.24,-1115.3 cw(c-3417.39,-1115.3) -3417.39,-1105.46 ; -3427.19,-1198.73 ccw(c-3417.35,-1198.73) -3417.35,-1208.57 ; -3427.22,-1115.29 cw(c-3417.37,-1115.29) -3417.37,-1105.44 ; -3426.09,-2179.09 cw(c-3416.25,-2179.09) -3416.25,-2169.25 ; -3426.04,-2262.52 ccw(c-3416.2,-2262.52) -3416.2,-2272.36 ; -3397.75,-1105.44 cw(c-3397.75,-1115.28) -3387.91,-1115.28 ccw(c-3397.72,-1115.29) -3397.72,-1105.44 ; -3397.7,-1208.57 ccw(c-3397.7,-1198.73) -3387.86,-1198.73 ; -3396.6,-2169.22 cw(c-3396.6,-2179.07) -3386.76,-2179.07 ; -3396.55,-2272.36 ccw(c-3396.55,-2262.52) -3386.71,-2262.52 ; -3247.84,-2709.78 ccw(c-3237.99,-2709.78) -3237.99,-2719.62 ; -3247.84,-2690.13 cw(c-3237.99,-2690.13) -3237.99,-2680.28 ; -3247.84,-687.73 ccw(c-3237.99,-687.73) -3237.99,-697.57 ; -3247.84,-668.08 cw(c-3237.99,-668.08) -3237.99,-658.24 ; -2913.19,-2719.62 ccw(c-2913.19,-2709.78) -2903.35,-2709.78 ; -2913.19,-2680.23 cw(c-2913.19,-2690.08) -2903.35,-2690.08 ; -2913.19,-697.57 ccw(c-2913.19,-687.73) -2903.35,-687.73 ; -2913.19,-658.19 cw(c-2913.19,-668.03) -2903.35,-668.03 ; -1136.04,-2709.78 ccw(c-1126.19,-2709.78) -1126.19,-2719.62 ; -1136.04,-2690.08 cw(c-1126.19,-2690.08) -1126.19,-2680.23 ; -1136.04,-687.73 ccw(c-1126.19,-687.73) -1126.19,-697.57 ; -1136.04,-668.03 cw(c-1126.19,-668.03) -1126.19,-658.19 ; -801.39,-2719.57 ccw(c-801.39,-2709.73) -791.55,-2709.73 ; -801.39,-2680.23 cw(c-801.39,-2690.08) -791.55,-2690.08 ; -801.39,-697.52 ccw(c-801.39,-687.68) -791.55,-687.68 ; -801.39,-658.19 cw(c-801.39,-668.03) -791.55,-668.03
  lines w1: -3427.23,-1198.69 -3427.23,-1115.3 ; -3426.08,-2262.47 -3426.08,-2179.09 ; -3417.78,-1105.44 -3397.69,-1105.44 ; -3417.74,-1105.44 -3407.52,-1105.44 -3397.73,-1105.44 ; -3417.34,-1208.58 -3407.55,-1208.58 -3397.33,-1208.58 ; -3416.63,-2169.23 -3396.55,-2169.23 ; -3416.19,-2272.37 -3406.4,-2272.37 -3396.18,-2272.37 ; -3387.89,-1115.1 -3387.86,-1199.11 ; -3387.84,-1187.38 -3387.84,-1115.33 ; -3386.74,-2178.89 -3386.71,-2262.9 ; -3247.84,-2710.14 -3247.84,-2699.93 -3247.84,-2690.13 ; -3247.84,-688.1 -3247.84,-677.88 -3247.84,-668.09 ; -3238.38,-2719.61 -2913.19,-2719.61 ; -3238.38,-697.56 -2913.19,-697.56 ; -3237.95,-2680.24 -2912.81,-2680.24 ; -3237.95,-658.19 -2912.81,-658.19 ; -2903.36,-2709.78 -2903.36,-2689.69 ; -2903.36,-687.73 -2903.36,-667.65 ; -1136.03,-2710.16 -1136.03,-2690.07 ; -1136.03,-688.11 -1136.03,-668.02 ; -1126.58,-2719.61 -801.44,-2719.61 ; -1126.58,-697.56 -801.44,-697.56 ; -1126.2,-2680.24 -801.01,-2680.24 ; -1126.2,-658.19 -801.01,-658.19 ; -791.54,-2709.72 -791.54,-2699.93 -791.54,-2689.71 ; -791.54,-687.67 -791.54,-677.88 -791.54,-667.66
  lines w2.95: -4251.58,-3377.8 -4251.58,-5 ; -4251.32,-4.43 cw(c-4026.09,-4.43) -4031.1,220.73 ; -4251.2,-3377.8 ccw(c-4026.03,-3372.8) -4026.03,-3598.02 ; -4030.17,220.55 -225.17,220.55 ; -4026.03,-3598.35 -220.16,-3598.35 ; -225.17,220.22 cw(c-225.17,-5) 0,0 0,-3386.04 ; -220.16,-3597.97 ccw(c-225.17,-3372.8) 0.06,-3372.8 ; 0.12,-3372.3 0.13,-2689.55
  lines w5: -946.5,-1304.7 cw(c-876.3,-1370.72) -807.05,-1303.7 -807.7,-1989.8 cw(c-877,-1921.1) -945.7,-1990.4 -946.5,-1304.7
Mechanical 15:
  circle w10: c-1164.81,-3113.7 r196.85
  circle w10: c-1806.54,-3113.7 r196.85
  circle w10: c-3090.17,-3113.7 r196.85
  circle w10: c-2448.27,-3113.7 r196.85
  lines w1: -632.1,-2699.93 -632.1,-677.88
  lines w9.84: -3407.69,-2699.93 -632.1,-2699.93 -632.1,-677.88 -3407.69,-677.88 -3407.69,-2699.93 ; -3299.02,-2579.45 -3299.02,-798.35 -952.17,-798.35 -952.17,-2579.45 -3299.02,-2579.45

## Text inside footprints (layer, text, board x,y; h text height)
EC1: Bottom Overlay "+" at -973.08,-293.26 h40 r180
EC2: Bottom Overlay "+" at -1213.57,-541.04 h40
U2: Bottom Overlay "LORa" at -256.2,-2541.7 h40
U8: Bottom Overlay "VCC  GND  TXD   RXD    EN   BAT" at -4173.36,-2637.9 h40 r180; Bottom Overlay "USB-V GND   DP     DN   LED BOOT" at -4179.31,-1966.26 h40 r180